# Allegro board KB_V15.brd
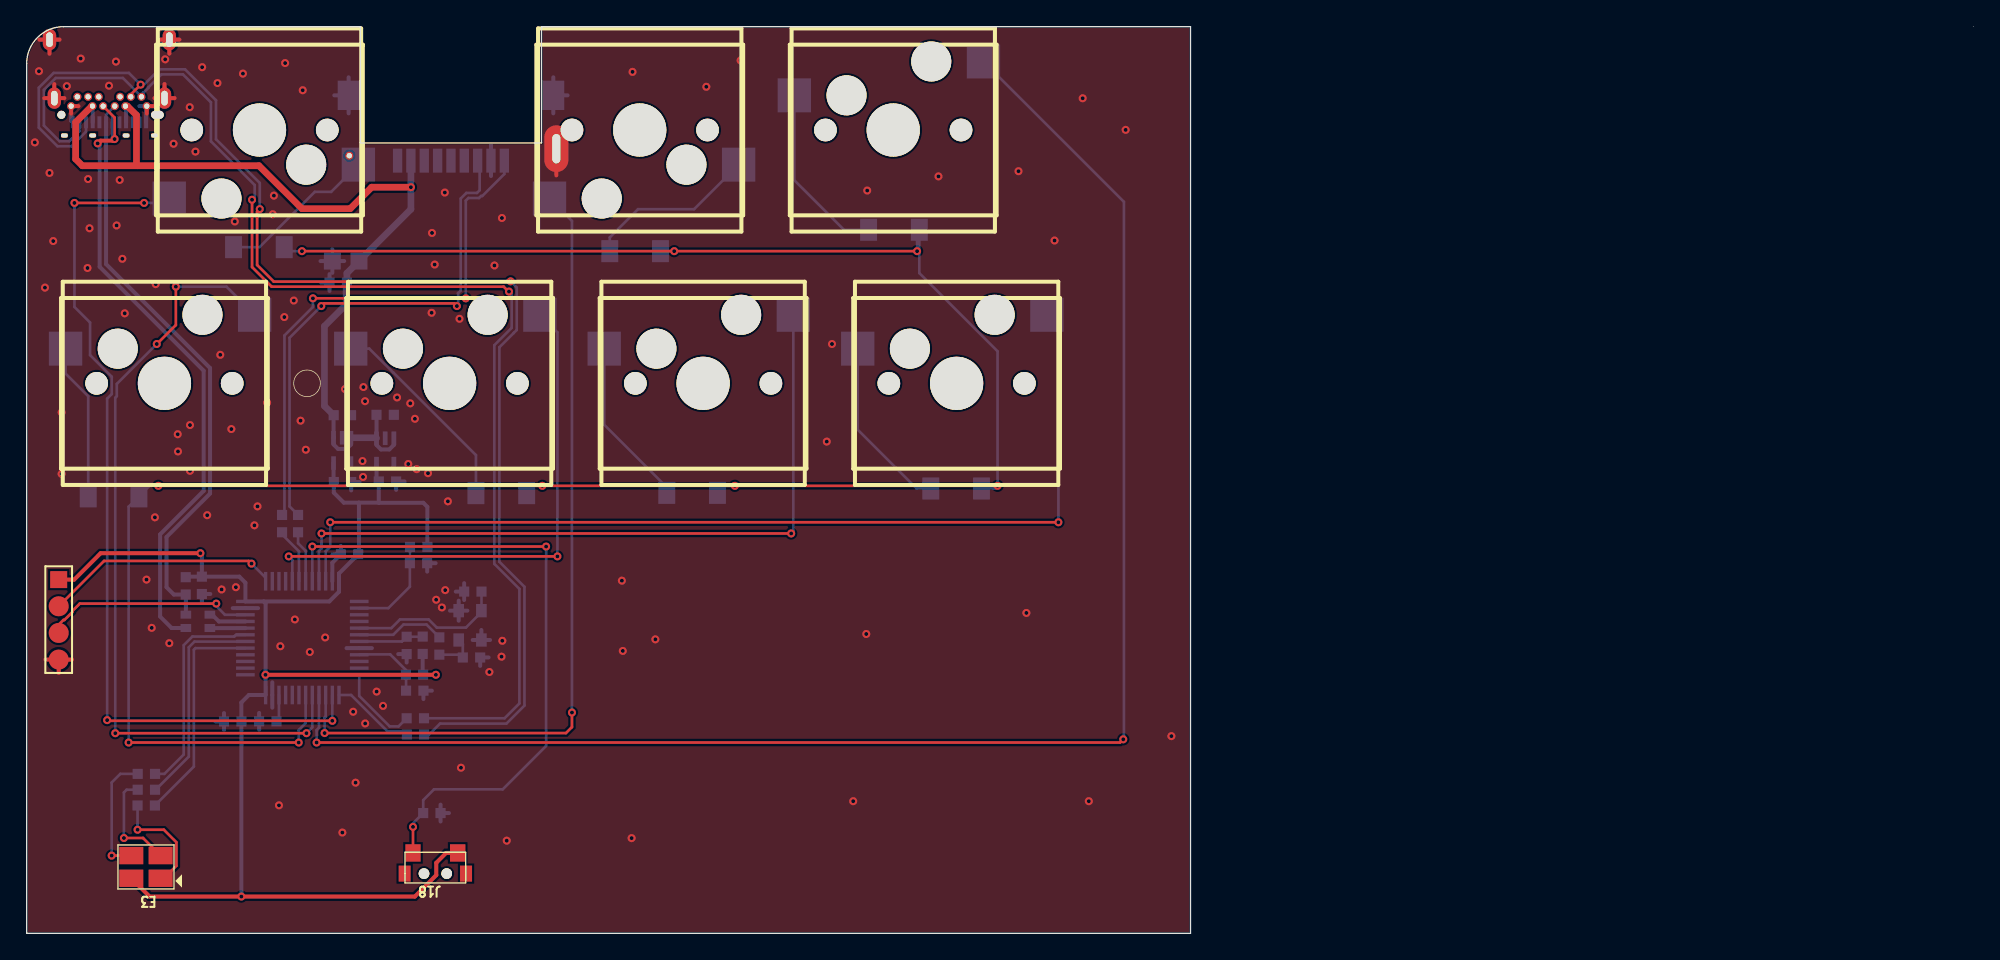
[diagram p0: board, top side]
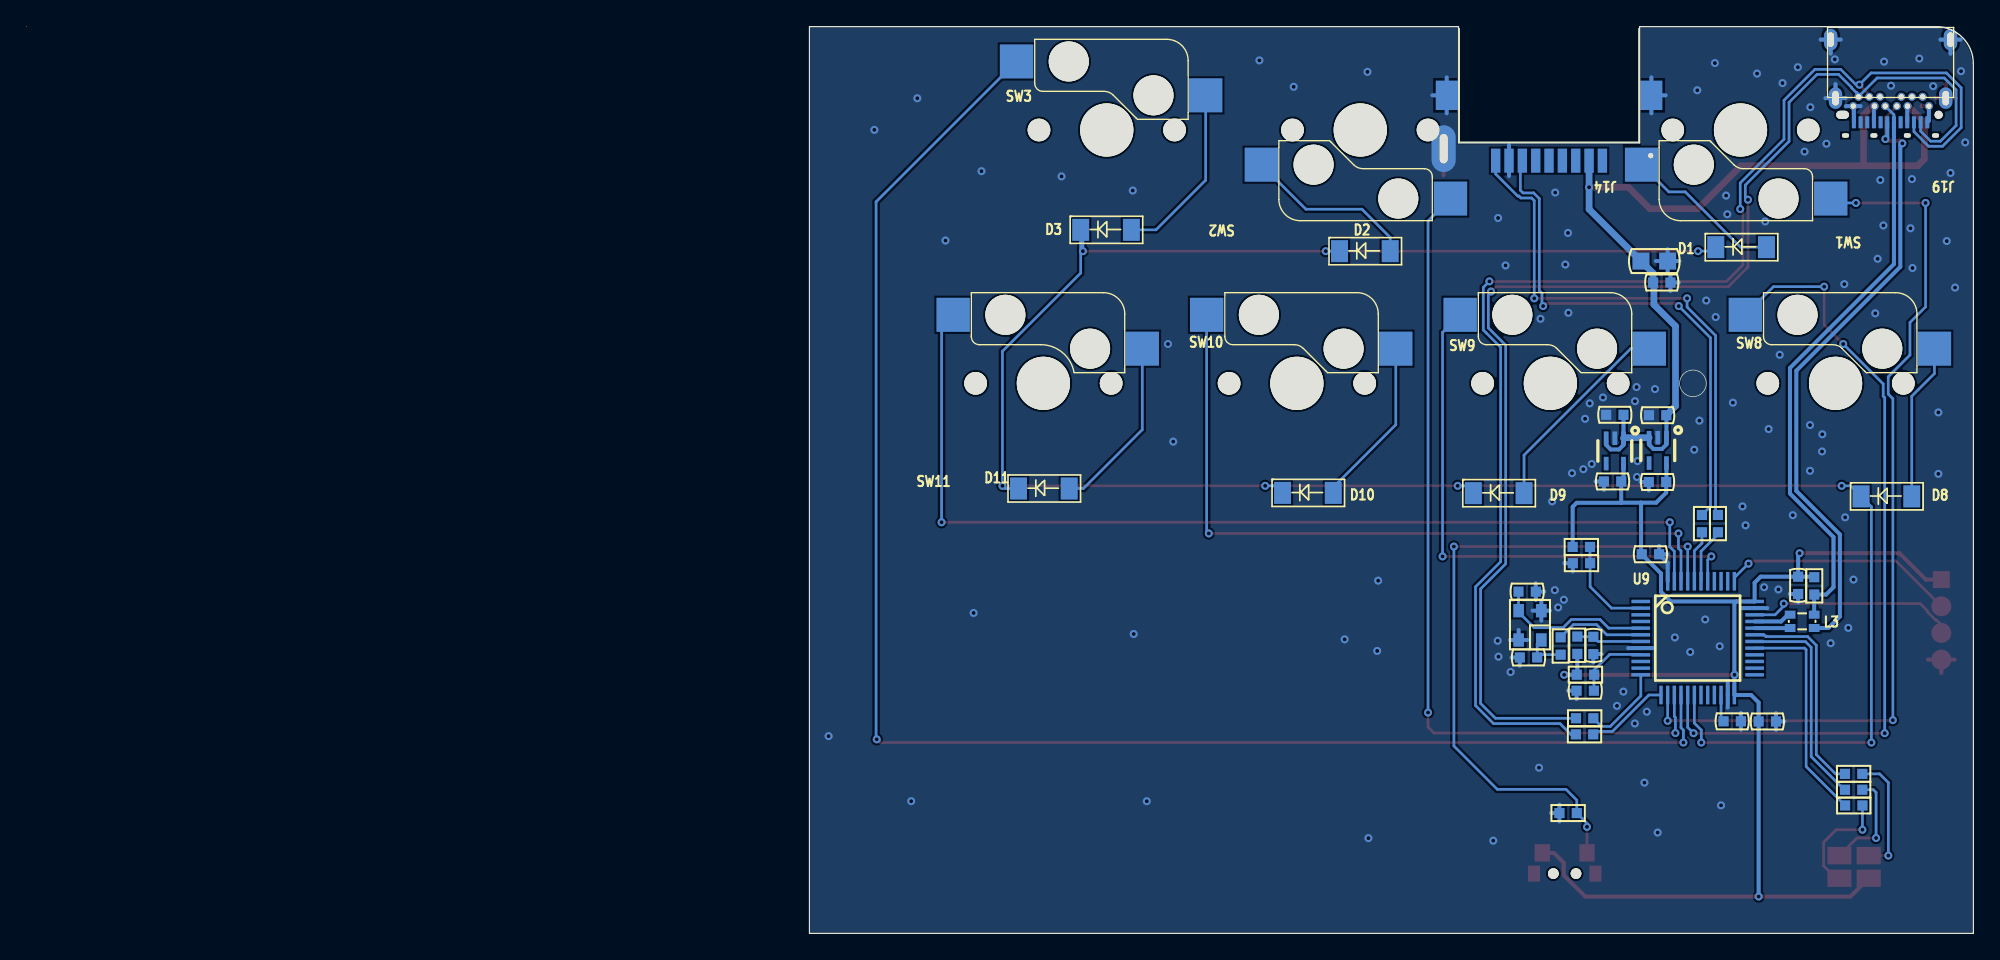
[diagram p1: board, bottom side, seen from below]

Outline 145.9 x 68 mm; copper layers: TOP, BOTTOM. Coordinates in mm from the lower left corner of the outline.
Outline path: circle c21.01,41.25 r1 ; 145.9,68 145.9,68 ; 0,65.23 arc(0.81,67.19) 2.77,68 25.01,68 25.01,59.28 38.59,59.28 38.59,68 87.23,68 87.23,0 0,0 0,65.23

## Design rules (mm)
nets with their own width: min track width 0.3; nets GND

## Placement (name value [footprint] x y rotation side)
C1  0.1uF/16V  [C0603]  28.48 22.24 270 bottom
C2  10uF/6.3V  [C0603]  16.09 15.89 180 bottom
C4  0.1uF/16V  [C0603]  13.13 26.75 270 bottom
C5  0.1uF/16V  [C0603]  24.85 28.43 180 bottom
C6  0.1uF/16V  [C0603]  28.44 18.2 0 bottom
C7  22pF/50V  [C0603]  32.79 25.63 0 bottom
C8  22pF/50V  [C0603]  33.99 20.69 180 bottom
C9  2.2uF/6.3V  [C0603]  18.72 15.9 180 bottom
C10  0.1uF/16V  [C0603]  24 48.81 180 bottom
C11  22uF/6.3V  [C0805]  24.91 50.42 180 bottom
C12  1uF/10V  [C0603]  23.01 38.86 0 bottom
C13  1uF/10V  [C0603]  23.02 33.85 0 bottom
C14  1uF/10V  [C0603]  26.22 38.89 0 bottom
C15  1uF/10V  [C0603]  26.39 33.89 0 bottom
D1  RB520S-30  [SOD123]  19.3 51.46 180 bottom
D2  RB520S-30  [SOD123]  47.5 51.16 180 bottom
D3  RB520S-30  [SOD123]  66.9 52.76 180 bottom
D8  RB520S-30  [SOD123]  8.41 32.77 180 bottom
D9  RB520S-30  [SOD123]  37.47 33.01 180 bottom
D10  RB520S-30  [SOD123]  51.77 33.03 180 bottom
D11  RB520S-30  [SOD123]  71.56 33.36 180 bottom
E3  RGB-LED  [LED_3528_2]  8.94 4.93 180 top
J2  ARM_PROG  [SIP_4P_50_DL_ARM]  2.4 26.53 270 top
J14  USB_A_TYPE  [USBATYPE]  31.8 67.85 0 bottom
J18  CON6  [KEYRESET]  30.63 4.48 180 top
J19  USBCTYPEDIP  [USBMINICTYPEDIP]  2.6 61.39 0 bottom
L1  300R/100MHz  [R0603]  29.72 19.4 180 bottom
L3  SDCW2012-2-900TF  [SDCW2012]  12.83 23.4 180 bottom
NOREF  -  []  87.23 0 90 top
NOREF#2  -  []  0 65.23 0 top
R2  10K/1%  [R0603]  29.68 20.96 90 bottom
R4  910R  [R0603]  30.93 20.9 90 bottom
R20  1K  [R0603]  8.31 9.59 0 bottom
R21  510R  [R0603]  8.32 10.77 0 bottom
R22  330R  [R0603]  8.32 11.96 0 bottom
R26  330R  [R0603]  31.02 9.02 180 bottom
R27  1.5K  [R0603]  11.92 25.41 90 bottom
R28  1K  [R0603]  30.02 27.76 180 bottom
R29  1K  [R0603]  28.73 28.98 0 bottom
R30  330R  [R0603]  19.14 31.38 270 bottom
R31  330R  [R0603]  20.34 31.38 270 bottom
R32  330R  [R0603]  29.78 16.13 180 bottom
R33  330R  [R0603]  29.79 14.92 180 bottom
SW1  2-WAY SWITCH  [KEY_SECOND]  17.45 60.25 0 bottom
SW2  2-WAY SWITCH  [KEY_SECOND]  45.95 60.25 0 bottom
SW3  2-WAY SWITCH  [KEY_SECOND]  64.95 60.25 180 bottom
SW8  2-WAY SWITCH  [KEY_SECOND]  10.33 41.25 180 bottom
SW9  2-WAY SWITCH  [KEY_SECOND]  31.7 41.25 180 bottom
SW10  2-WAY SWITCH  [KEY_SECOND]  50.7 41.25 180 bottom
SW11  2-WAY SWITCH  [KEY_SECOND3]  69.7 41.25 180 bottom
U3  SGM2019-3.3YC5G/TR  [SC70-5]  26.87 36.18 270 bottom
U4  SGM2019-3.3YC5G/TR  [SC70-5]  23.65 36.22 270 bottom
U9  STM32F103C6  [LQFP48_20_355]  20.66 22.14 180 bottom
Y1  12MHz/12pF/30ppm  [OSC3225]  33.23 23.1 0 bottom

## Library data of the parts
C1 C2 C4-C10 C12-C15 = CAP NP: User Part Number: *; Tolerance: *
C11 = CAP NP: Tolerance: *; User Part Number: *
D1-D3 D8-D11 = DIODE
E3 = LED_3528_RGB
J2 = CON4
J14 = CON13
J18 = CON6
J19 = CON34
L1 = BEAD: User Part Number: *; Tolerance: *
L3 = CHOKE CM14
R2 R4 R20-R22 R26-R33 = R: User Part Number: *; Tolerance: *
SW1-SW3 SW8-SW11 = SW KEY-SPST
U3 U4 = PAM3101DBA330
U9 = STM32F103C6
Y1 = CRYSTAL-3225: User Part Number: pn; Tolerance: RichardLC

## Footprints (pads in the part's own frame, mm; a bottom-side part is the same pattern mirrored in y, then rotated)
C0603
  rect 0.76x0.76 smd: 1(0,0) 2(1.3,0)
C0805
  rect 1.27x1.27 smd: 1(0,0) 2(2,0)
KEY_SECOND
  round 1.702 hole 1.702 unplated: (-5.08,0) (5.08,0)
  round 3 hole 3 unplated: (-2.85,5.14) (3.5,2.6)
  round 3.988 hole 3.988 unplated: (0,0)
  rect 2.5x2.55 smd: 1(-6.763,5.14) 2(7.412,2.6)
KEY_SECOND3
  round 1.702 hole 1.702 unplated: (-5.08,0) (5.08,0)
  round 3 hole 3 unplated: (-2.85,5.14) (3.5,2.6)
  round 3.988 hole 3.988 unplated: (0,0)
  rect 2.5x2.55 smd: 1(-6.763,5.14) 2(7.412,2.6)
KEYRESET
  round 0.8 hole 0.8 unplated: (-0.85,0) (0.85,0)
  rect 0.9x1.2 smd: 1(-2.3,0) 2(2.3,0)
  rect 1.15x1.3 smd: 3(-1.675,-1.55) 4(1.675,-1.55)
LED_3528_2
  rect 1.8x1.3 smd: 1(-1.1,0.8) 2(-1.1,-0.9) 3(1.1,-0.9) 4(1.1,0.8)
LQFP48_20_355
  rect 1.397x0.254 smd: 1(-4.266,2.75) 2(-4.266,2.25) 3(-4.266,1.75) 4(-4.266,1.25) 5(-4.266,0.75) 6(-4.266,0.25) 7(-4.266,-0.25) 8(-4.266,-0.75) 9(-4.266,-1.25) 10(-4.266,-1.75) 11(-4.266,-2.25) 12(-4.266,-2.75) 25(4.266,-2.75) 26(4.266,-2.25) 27(4.266,-1.75) 28(4.266,-1.25) 29(4.266,-0.75) 30(4.266,-0.25) 31(4.266,0.25) 32(4.266,0.75) 33(4.266,1.25) 34(4.266,1.75) 35(4.266,2.25) 36(4.266,2.75)
  rect 0.254x1.397 smd: 13(-2.75,-4.266) 14(-2.25,-4.266) 15(-1.75,-4.266) 16(-1.25,-4.266) 17(-0.75,-4.266) 18(-0.25,-4.266) 19(0.25,-4.266) 20(0.75,-4.266) 21(1.25,-4.266) 22(1.75,-4.266) 23(2.25,-4.266) 24(2.75,-4.266) 37(2.75,4.266) 38(2.25,4.266) 39(1.75,4.266) 40(1.25,4.266) 41(0.75,4.266) 42(0.25,4.266) 43(-0.25,4.266) 44(-0.75,4.266) 45(-1.25,4.266) 46(-1.75,4.266) 47(-2.25,4.266) 48(-2.75,4.266)
OSC3225
  rect 0.8x1 smd: 1(-0.85,1.1) 2(-0.85,-1.1) 3(0.85,-1.1) 4(0.85,1.1)
R0603
  rect 0.76x0.76 smd: 1(0,0) 2(1.3,0)
SC70-5
  rect 1.016x0.356 smd: 1(-0.95,0.65) 2(-0.95,0) 3(-0.95,-0.65) 4(0.95,-0.65) 5(0.95,0.65)
SDCW2012
  rect 0.8x0.6 smd: 1(-0.9,0.5) 2(0.9,0.5) 3(0.9,-0.5) 4(-0.9,-0.5)
SIP_4P_50_DL_ARM
  rect 1.27x1.27 smd: 1(0,0)
  round 1.5 smd: 2(2,0) 3(4,0) 4(6,0)
SOD123
  rect 1.27x1.651 smd: 1(3.8,0) 2(0,0)
USBATYPE
  rect 0.7x1.8 smd: 1(-3,9.9) 2(-1,9.9) 3(1,9.9) 4(3,9.9) 5(4,9.9) 6(2,9.9) 7(0,9.9) 8(-2,9.9) 9(-4,9.9)
  rect 1.64x2.2 smd: 10(-7.67,5) 11(7.67,5)
  round 0.6 hole 0.4: 12(-7.62,9.525)
  oval 1.8x3.5 hole 0.6x2.2: 13(7.9,9)
USBMINICTYPEDIP
  rect 0.5x0.3 hole 0.5x0.3 unplated: (0.23,1.55) (2.35,1.55) (4.85,1.55) (6.98,1.55)
  oval 0.95x0.6 hole 0.95x0.6 unplated: (7.2,0)
  rect 0.3x0.9 smd: 1(0.85,0.56) 2(1.35,0.56) 3(1.85,0.56) 4(2.35,0.56) 5(2.85,0.56) 6(3.35,0.56) 7(3.85,0.56) 8(4.35,0.56) 9(4.85,0.56) 10(5.35,0.56) 11(5.85,0.56) 12(6.35,0.56)
  round 0.6 hole 0.4: 13(6.4,-0.65) 14(6,-1.35) 15(5.2,-1.35) 16(4.8,-0.65) 17(4.4,-1.35) 18(4,-0.65) 19(3.13,-0.65) 20(2.8,-1.35) 21(2.33,-0.65) 22(2,-1.35) 23(1.2,-1.35) 24(0.73,-0.65)
  round 0.6 hole 0.65: 25(0,0)
  oval 1x1.6 hole 0.5x1.1: 27(-0.53,-1.25) 28(7.73,-1.25) 29(-0.89,-5.64) 30(8.09,-5.64)

## Nets
GND: C1.2 C2.2 C4.2 C5.2 C6.2 C7.1 C8.1 C9.2 C10.2 C11.2 C12.2 C13.2 C14.2 C15.2 J2.4 J14.4 J14.10 J14.11 J14.13 J19.1 J19.12 J19.13 J19.24 J19.27 J19.28 J19.29 J19.30 R26.1 R28.1 U3.2(GND) U4.2(GND) U9.8(VSSA/VREF-) U9.23(VSS1) U9.35(VSS2) U9.47(VSS3) Y1.2(GND#2) Y1.4(GND#4)
VBUS_R: C10.1 C11.1 C12.1 C14.1 J14.1 J19.4 J19.9 J19.16 J19.21 U3.1(VIN) U3.3(EN) U4.1(VIN) U4.3(EN)
VCC_3V3_R: C2.1 C4.1 C5.1 C13.1 C15.1 E3.4(COM) J2.1 J18.3 L1.1 R2.1 R27.2 R29.2 U3.5(VOUT) U4.5(VOUT) U9.24(VDD1) U9.36(VDD2) U9.48(VDD3)
ARM_SWCLK_R: J2.2 U9.37(PA14/JTCK_SWCK)
ARM_SWDIO_R: J2.3 U9.34(PA13/JTMS_SWDIO)
CA1: U9.3(PC14/OSC32_IN)
CA2: U9.4(PC15/OSC32_OUT)
CA3: U9.38(PA15/JTDI/SPI1_NSS/SPI3_NSS/I2S)
CA4: U9.21(PB10/SPI2_SCK/I2S2_CK/I2C2_SCL/)
CA5: U9.25(PB12/SPI2_NSS/I2S2_WS/I2C2_SMBA)
CA6: U9.26(PB13/SPI2_SCK/I2S2_CK/TIM1_CH1N)
CA7: U9.27(PB14/SPI2_MISO/I2S2EXT_SD/TIM1_)
CA8: U9.28(PB15/SPI2_MOSI/I2S2_SD/TIM1_CH3)
COL1: U9.10(PA0/USART2_CTS/TIM2_CH1/TIM2_ET)
COL2: U9.11(PA1/USART2_RTS/TIM2_CH2/TIM5_CH)
COL3: SW1.1 U9.14(PA4/SPI1_NSS/SPI3_NSS/I2S3_WS/U)
COL4: SW2.1 U9.15(PA5/SPI1_SCK/TIM2_CH1/TIM2_ETR/)
COL5: SW3.1 U9.16(PA6/SPI1_MISO/TIM1_BKIN/TIM3_CH)
COL6: SW8.1 U9.17(PA7/SPI1_MOSI/TIM1_CH1N,TIM3_CH)
COL7: SW9.1 U9.41(PB5/SPI1_MOSI/SPI3_MOSI/I2S3_SD)
COL8: SW10.1 U9.45(PB8/I2C1_SCL/TIM4J_CH3/TIM10_CH)
COL9: SW11.1 U9.46(PB9/SPI2_NSS/I2S2_WS/I2C1_SDA/T)
PA15_R_B: R22.2 U9.31(PA10/USART1_RX/TIM1_CH3/OTG_FS_)
PC14_R_R: R20.2 U9.29(PA8/I2C3_SCL/USART1_CK/TIM1_CH1)
PC15_R_G: R21.2 U9.30(PA9/I2C3_SMBA/USART1_TX/TIM1_CH)
PCBVER: R28.2 R29.1 U9.2(PC13/RTC_TAMP1/RTC_OUT/RTC_TS)
ROW1: D1.2(K) D2.2(K) D3.2(K) D8.2(K) D9.2(K) D10.2(K) D11.2(K) U9.18(PB0/TIM1_CH2N/TIM3_CH3/ADC1_IN8)
ROW2: U9.19(PB1/TIM1_CH3N/TIM3_CH4/ADC1_IN9)
ROW3: U9.20(PB2/BOOT1)
ROW4: U9.39(PB3/JTDO_SWO/SPI1_SCK/SPI3_SCK/)
ROW5: U9.40(PB4/NJTRST/SPI1_MISO/SPI3_MISO_)
UART1_RX: J14.6 R31.1
UART1_RX_R: R31.2 U9.43(PB7/I2C1_SDA/USART1_RX/TIM4_CH2)
UART1_TX: J14.5 R30.1
UART1_TX_R: R30.2 U9.42(PB6/I2C1_SCL/USART1_TX/TIM4_CH1)
UART2_RX: J19.3 J19.15 R33.1
UART2_RX_R: R33.2 U9.13(PA3/USART2_RX/TIM2_CH4/TIM5_CH4)
UART2_TX: J19.2 J19.14 R32.1
UART2_TX_R: R32.2 U9.12(PA2/USART2_TX/TIM2_CH3/TIM5_CH3)
USB_DM_R: J19.7 J19.19 L3.3
USB_DP_R: J19.6 J19.18 L3.2 R27.1
N16733493: D1.1(A) SW1.2
N16734057: D2.1(A) SW2.2
N16734061: D3.1(A) SW3.2
N16734065: D8.1(A) SW8.2
N16734085: D9.1(A) SW9.2
N16734089: D10.1(A) SW10.2
N16734093: D11.1(A) SW11.2
N16743024: J18.4 R26.2 U9.44(BOOT0)
N16743076: C6.1 L1.2 U9.9(VDDA/VREF+)
N16743758: C1.1 R2.2 U9.7(NRST)
N16743834: C8.2 R4.1 Y1.1(XIN)
N16743838: C7.2 U9.5(PH0/OSC_IN) Y1.3(XOUT)
N16743898: R4.2 U9.6(PH1/OSC_OUT)
N16744056: C9.1 U9.22(VCAP1)
N16744084: L3.1 U9.33(PA12/USART1_RTS/USART6_RX/TIM1_)
N16744088: L3.4 U9.32(PA11/USART1_CTS/USART6_TX/TIM1_)
N16823930: E3.1(R) R20.1
N16823933: E3.2(G) R21.1
N16823936: E3.3(B) R22.1

Pads without a net: J14 2 3 7 8 9 12; J18 1 2; J19 5 8 10 11 17 20 22 23 25; U3 4; U4 4; U9 1

## Via types
v1: diameter 0.6, hole 0.3, TOP to BOTTOM, 160 vias

## Routing (per net, layer and track width the routed paths; a pad name or vN(x,y) marks a point on that pad's centre or on a via; arc(x,y) is an arc through that point)
GND: length 73.8
  TOP w0.3: 10.69,65.98 J19.30 ; J19.30 11.44,67.03 ; J19.30 9.94,67.03 ; 3.88,62.04 J19.24 3.33,61.49 ; 9.55,62.04 J19.13 9,61.49 ; 1.32,62.64 J19.27 ; J19.27 2.07,63.69 ; J19.27 2.82,62.64 ; 39.7,56.85 39.7,57.73 ; J19.28 11.08,62.64 ; J19.28 10.33,63.69 ; J19.28 9.58,62.64 ; 1.71,65.98 J19.29 ; J19.29 2.46,67.03 ; J19.29 0.96,67.03 ; J2.4 3.4,20.53 ; J2.4 1.4,20.53 ; J2.4 2.4,19.53
  TOP w0.5: 39.7,57.73 J14.13
  BOTTOM w0.3: 33.43,22 Y1.4 ; Y1.4 34.08,22.75 ; Y1.4 34.73,22 ; 18.41,16.93 U9.23 18.41,18.82 ; J19.28 11.08,62.64 ; J19.28 9.58,62.64 ; J19.28 10.33,63.69 ; 10.69,65.98 J19.30 ; J19.30 11.44,67.03 ; J19.30 9.94,67.03 ; 23.06,62.85 J14.10 ; J14.10 24.13,64.2 ; J14.10 24.13,61.5 ; 27.85,20.94 C1.2 28.48,20.31 ; 22.07,48.81 C10.2 ; C10.2 22.7,49.44 ; C10.2 22.7,48.18 ; 23.98,21.39 U9.8 25.87,21.39 ; 14.79,15.26 C2.2 ; C2.2 14.79,16.52 ; C2.2 14.16,15.89 ; C11.2 22.91,51.31 ; C11.2 22.02,50.42 ; C11.2 22.91,49.53 ; C11.2 23.8,50.42 ; 30.02,27.13 R28.1 30.65,27.76 ; J19.13 9.55,62.04 ; J19.13 8.45,62.04 ; J19.13 8.95,61.99 J19.12 ; 32.79,25 C7.1 ; C7.1 32.79,26.26 ; C7.1 32.16,25.63 ; 28.32,33.89 C15.2 27.69,33.26 ; 15.44,24.39 U9.35 17.34,24.39 ; 1.71,65.98 J19.29 ; J19.29 2.46,67.03 ; J19.29 0.96,67.03 ; 24.95,33.85 C13.2 24.32,33.22 ; 17.42,16.53 C9.2 17.42,15.27 ; Y1.2 32.38,24.95 ; Y1.2 31.73,24.2 ; Y1.2 33.03,24.2 ; Y1.2 32.38,23.45 ; U9.47 22.91,27.79 C5.2 ; C5.2 23.55,29.06 ; C5.2 22.92,28.43 ; J14.11 40.54,62.85 ; J14.11 39.47,61.5 ; J14.11 39.47,64.2 ; 34.62,20.69 C8.1 33.99,20.06 ; 30.37,18.2 C6.2 29.74,17.57 ; 34.8,59.1 J14.4 34.8,56.8 ; J19.1 3.33,60.95 J19.24 ; R26.1 31.02,9.65 ; R26.1 31.65,9.02 ; R26.1 31.02,8.39 ; 13.13,24.82 C4.2 13.76,25.45
  vias: v1(0.61,59.32) v1(0.92,64.66) v1(1.37,48.43) v1(1.71,57.03) v1(1.99,51.92) v1(2.62,39.07) v1(2.62,34.46) v1(3.01,63.54) v1(4.05,65.61) v1(4.56,49.9) v1(4.6,56.57) v1(4.71,52.88) v1(6.17,63.57) v1(6.69,65.38) v1(6.74,53.09) v1(6.97,56.5) v1(7.17,50.59) v1(7.35,46.5) v1(8.98,26.53) v1(9.37,22.91) v1(9.67,48.69) v1(9.61,31.2) v1(10.38,65.55) v1(10.69,21.76) v1(11.01,59.22) v1(11.32,37.43) v1(11.34,36.14) v1(12.22,61.96) v1(12.24,38.12) v1(12.24,34.69) v1(12.65,58.63) v1(13.15,64.96) v1(13.53,31.36) v1(14.3,63.77) v1(14.51,43.39) v1(14.61,25.79) v1(15.34,37.82) v1(15.6,53.39) v1(15.68,25.96) v1(16.21,64.48) v1(17.07,30.6) v1(17.3,32.02) v1(18.02,39.8) v1(18.44,53.93) v1(18.53,55.33) v1(18.91,9.6) v1(19.01,21.53) v1(19.37,65.27) v1(19.31,46.22) v1(20.02,47.46) v1(20.1,23.54) v1(20.53,38.45) v1(20.69,63.23) v1(20.92,36.27) v1(21.22,21.1) v1(22.37,22.19) v1(23.66,7.56) v1(23.86,40.82) v1(24.47,16.62) v1(24.65,11.3) v1(25.17,35.42) v1(25.24,40.97) v1(25.21,34.23) v1(25.36,39.91) v1(25.37,15.74) v1(26.23,18.13) v1(26.71,17.06) v1(27.76,40.19) v1(28.6,35.2) v1(28.75,39.75) v1(29.1,38.59) v1(29.23,34.81) v1(30.08,34.51) v1(30.38,52.53) v1(30.35,46.54) v1(30.58,50.16) v1(30.69,25.02) v1(31.12,24.44) v1(31.34,55.56) v1(31.37,25.74) v1(31.57,32.4) v1(32.44,46.09) v1(32.55,12.42) v1(34.68,19.6) v1(35.06,50.09) v1(35.59,20.75) v1(35.62,53.65) v1(35.65,21.94) v1(35.98,6.95) v1(44.61,26.45) v1(44.68,21.18) v1(45.34,7.14) v1(45.41,64.61) v1(47.12,22.05) v1(50.94,63.49) v1(53.51,65.47) v1(59.97,36.88) v1(60.36,44.2) v1(61.95,9.91) v1(63,55.71) v1(62.93,22.45) v1(68.34,56.77) v1(74.34,57.16) v1(74.93,24.03) v1(77.04,51.96) v1(79.15,62.63) v1(79.61,9.91) v1(82.37,60.26) v1(85.8,14.79)
VBUS_R: length 71.8
  TOP w0.5: 8.24,57.62 8.19,57.57 4.17,57.57 3.67,58.07 3.67,60.83 4.88,62.04 J19.21 ; 8.24,57.62 8.23,57.63 8.23,61.36 7.55,62.04 J19.16 ; 8.24,57.62 8.29,57.57 17.41,57.57 20.63,54.35 24.25,54.35 25.86,55.96 v1(28.8,55.96)
  BOTTOM w0.3: J19.9 7.45,61.99 J19.16 ; U4.3 24.3,36.65 23.98,36.33 23.34,36.33 23,36.67 U4.1 23,38.85 C12.1 ; J19.4 4.95,62.02 J19.21 ; U3.3 27.52,36.63 27.18,36.29 26.56,36.29 26.22,36.63 U3.1 C14.1
  BOTTOM w0.5: C12.1 22.32,39.55 22.32,45.54 23.94,47.16 23.94,48.75 C10.1 24,49.51 C11.1 28.8,54.31 v1(28.8,55.96) J14.1 ; U3.1 26.18,37.17 U4.3
VCC_3V3_R: length 115.6
  TOP w0.3: J2.1 3.56,26.53 5.54,28.51 v1(13.02,28.51) ; E3.4 9.21,2.76 v1(16.09,2.76) 29.09,2.76 30.7,4.37 30.7,5.29 31.44,6.03 J18.3 ; 17.91,19.4 v1(17.9,19.39) v1(30.67,19.39)
  BOTTOM w0.3: 24.9,32.3 26.39,32.3 ; 24.9,32.3 23.77,32.3 23.02,33.05 C13.1 23,33.87 U4.5 ; 24.9,32.3 24.9,28.48 C5.1 23.41,26.99 U9.48 23.41,25.61 22.69,24.89 17.77,24.89 ; 26.39,32.3 C15.1 26.22,34.06 U3.5 ; 26.39,32.3 26.4,32.29 29.73,32.29 30.03,31.99 R29.2 ; v1(16.09,2.76) C2.1 16.09,17.31 16.65,17.87 U9.24 17.91,19.4 ; 17.77,24.89 17.91,24.75 17.91,19.4 ; 17.77,24.89 U9.36 16.39,26.3 15.94,26.75 C4.1 ; v1(13.02,28.51) 13.13,28.4 C4.1 ; v1(30.67,19.39) 29.73,19.39 L1.1 29.68,19.44 R2.1 ; C4.1 11.96,26.75 R27.2 ; 17.91,19.4 v1(17.9,19.39)
ARM_SWCLK_R: length 17.7
  TOP w0.2: J2.2 5.8,27.93 16.65,27.93 v1(16.85,27.73)
  BOTTOM w0.2: v1(16.85,27.73) 17.91,26.67 U9.37
ARM_SWDIO_R: length 15.8
  TOP w0.2: v1(14.21,24.73) 3.98,24.73 3.43,24.18 3.43,24.1 2.83,23.5 2.75,23.5 2.4,23.15 J2.3
  BOTTOM w0.2: v1(14.21,24.73) 14.21,24.54 14.86,23.89 U9.34
COL3: length 66.3
  TOP w0.2: v1(22.91,15.94) 6.08,15.94 v1(6.03,15.99) ; v1(3.58,54.78) v1(8.8,54.78)
  BOTTOM w0.2: 10.79,55.01 SW1.1 10.36,54.78 v1(8.8,54.78) ; v1(6.03,15.99) 6.03,40.1 6.38,40.45 6.38,41.74 4.75,43.37 4.75,45.81 3.58,46.98 v1(3.58,54.78) ; U9.14 v1(22.91,15.94)
COL4: length 62
  TOP w0.2: v1(22.33,15.02) 40.42,15.02 40.87,15.47 v1(40.87,16.56)
  BOTTOM w0.2: SW2.1 40.87,53.43 v1(40.87,16.56) ; U9.15 22.41,16.26 22.33,16.18 v1(22.33,15.02)
COL5: length 119.4
  TOP w0.2: v1(21.73,14.31) 81.95,14.31 v1(82.19,14.55)
  BOTTOM w0.2: U9.16 21.91,15.42 21.73,15.24 v1(21.73,14.31) ; SW3.1 82.24,54.86 82.24,14.6 v1(82.19,14.55)
COL6: length 59.5
  TOP w0.2: v1(11.18,48.5) 11.18,45.62 9.76,44.2 v1(9.75,44.2) ; v1(20.97,15.01) v1(6.64,15.01)
  BOTTOM w0.2: v1(11.18,48.5) 14.98,48.5 SW8.1 ; v1(6.64,15.01) 6.64,40.17 6.76,40.29 6.76,41.21 v1(9.75,44.2) ; v1(20.97,15.01) 21.41,15.45 U9.17
COL7: length 40.8
  TOP w0.2: v1(19.64,28.27) v1(39.78,28.27)
  BOTTOM w0.2: v1(19.64,28.27) 19.91,28 U9.41 ; v1(39.78,28.27) 39.78,45.07 SW9.1
COL8: length 55.3
  TOP w0.2: v1(22.1,29.99) v1(57.3,29.99)
  BOTTOM w0.2: U9.45 21.91,28.69 22.1,28.88 v1(22.1,29.99) ; v1(57.3,29.99) 57.46,30.15 SW10.1
COL9: length 75.1
  TOP w0.2: v1(22.75,30.83) v1(77.33,30.83)
  BOTTOM w0.2: U9.46 22.41,28.65 22.75,28.99 v1(22.75,30.83) ; v1(77.33,30.83) 77.33,45.52 SW11.1
Net_2: length 0.1
  BOTTOM w0.2: 24.88,57.51 24.88,57.65
PA15_R_B: length 15.9
  BOTTOM w0.2: U9.31 15.69,22.39 15.6,22.3 15.58,22.3 15.54,22.26 12.42,22.26 11.77,21.61 11.77,13.41 10.32,11.96 R22.2
PC14_R_R: length 16.8
  BOTTOM w0.2: U9.29 12.65,21.39 12.53,21.27 12.53,12.51 R20.2
PC15_R_G: length 16.2
  BOTTOM w0.2: U9.30 16.38,21.88 12.58,21.88 12.15,21.45 12.15,13.25 9.67,10.77 R21.2
PCBVER: length 7.4
  BOTTOM w0.2: R29.1 28.73,27.77 R28.2 28.72,26 27.11,24.39 U9.2
ROW1: length 176.1
  TOP w0.2: v1(20.39,14.31) v1(7.64,14.31) ; v1(20.63,51.16) v1(48.53,51.16) v1(66.74,51.16) ; v1(9.87,33.56) v1(38.65,33.56) v1(53.08,33.56) v1(72.77,33.56)
  BOTTOM w0.2: D11.2 72.57,33.36 v1(72.77,33.56) 72.77,43.65 66.9,49.52 D3.2 66.74,52.6 v1(66.74,51.16) ; v1(20.39,14.31) 20.39,15.25 20.91,15.77 U9.18 ; v1(38.65,33.56) 38.02,33.56 D9.2 ; D2.2 v1(48.53,51.16) ; v1(20.63,51.16) 19.6,51.16 D1.2 ; D10.2 52.3,33.56 v1(53.08,33.56) ; v1(9.87,33.56) 9.2,33.56 D8.2 7.64,32 v1(7.64,14.31)
UART1_RX: length 39.4
  TOP w0.2: v1(22.08,47.04) 22.28,47.24 32.05,47.24 v1(32.25,47.04)
  BOTTOM w0.2: J14.6 33.95,57.8 33.95,55.73 33.75,55.53 32.95,55.53 32.53,55.11 32.53,48.21 32.33,48.01 32.33,47.13 v1(32.25,47.04) ; R31.1 19.7,32.02 19.7,44.66 v1(22.08,47.04)
UART1_RX_R: length 3.9
  BOTTOM w0.2: R31.2 20.34,29.26 20.91,28.69 U9.43
UART1_TX: length 40.7
  TOP w0.2: v1(21.46,47.62) v1(32.91,47.62)
  BOTTOM w0.2: R30.1 19.32,31.56 19.32,44.84 21.46,46.97 v1(21.46,47.62) ; J14.5 35.8,56.95 34.15,55.3 34.06,55.3 33.91,55.15 33.11,55.15 32.91,54.95 v1(32.91,47.62)
UART1_TX_R: length 4.2
  BOTTOM w0.2: R30.2 19.14,29.92 20.41,28.65 U9.42
UART2_RX: length 100.1
  TOP w0.2: v1(17.47,54.32) 17.27,54.12 17.27,50.13 18.52,48.88 36.25,48.88 v1(36.27,48.9) ; v1(8.54,63.65) 7.8,62.91 J19.15
  BOTTOM w0.2: v1(36.27,48.9) 36.73,48.44 36.73,45.25 36.51,45.03 35.43,43.95 35.43,27.87 37.31,25.99 37.31,17.08 35.96,15.73 30.98,15.73 30.17,14.92 R33.1 ; v1(17.47,54.32) 17.47,56.28 14.19,59.56 14.19,62.48 11.87,64.8 9.94,64.8 8.79,63.65 v1(8.54,63.65) 7.66,64.53 2.02,64.53 0.91,63.42 0.91,60.43 2.31,59.03 3.35,59.03 4.45,60.13 J19.3
UART2_RX_R: length 6.3
  BOTTOM w0.2: U9.13 24.32,17.87 27.05,15.14 28.27,15.14 R33.2
UART2_TX: length 95.7
  TOP w0.2: v1(36.15,48.13) 36.02,48.26 35.99,48.26 35.75,48.5 18.36,48.5 16.89,49.97 v1(16.89,55.02)
  BOTTOM w0.2: v1(36.15,48.13) 36.22,48.06 36.22,48.05 36.35,47.92 36.35,45.41 35.05,44.11 35.05,27.71 36.93,25.83 36.93,17.24 35.82,16.13 R32.1 ; J19.2 3.95,60.16 3.2,59.41 2.46,59.41 1.29,60.58 1.29,63.26 2.18,64.15 7.21,64.15 8.6,62.76 ; 8.6,62.76 J19.14 ; 8.6,62.76 8.6,62.92 8.75,63.07 8.78,63.07 9.12,63.41 9.12,63.44 10.1,64.42 11.71,64.42 13.81,62.32 13.81,59.4 17.09,56.12 17.09,55.22 v1(16.89,55.02)
UART2_TX_R: length 6.3
  BOTTOM w0.2: U9.12 24.92,17.8 27.21,15.52 27.87,15.52 R32.2
USB_DM_R: length 48
  TOP w0.2: J19.19 6.59,61.18 v1(6.59,59.57)
  TOP w0.3: v1(5.32,59.25) 5.52,59.45 6.47,59.45 v1(6.59,59.57)
  BOTTOM w0.3: v1(6.59,59.57) 6.45,59.71 J19.7 ; L3.3 10.86,22.9 10,23.76 10,29.92 13.26,33.19 13.26,42.2 5.47,49.99 5.47,59.1 v1(5.32,59.25)
USB_DP_R: length 44.1
  BOTTOM w0.2: J19.6 5.95,61.39 J19.18
  BOTTOM w0.3: L3.2 11.93,25.4 R27.1 11.03,25.41 10.48,25.96 10.48,29.72 13.74,32.98 13.74,42.39 5.95,50.19 J19.6
N16733493: length 11.9
  BOTTOM w0.2: SW1.2 22.82,55.61 21.59,55.61 17.45,51.46 D1.1
N16734057: length 12.9
  BOTTOM w0.2: D2.1 43.7,52.19 45.82,54.31 50.02,54.31 SW2.2
N16734061: length 13.5
  BOTTOM w0.2: D3.1 61.26,52.76 57.54,56.48 SW3.2
N16734065: length 11.8
  BOTTOM w0.2: D8.1 4.61,40.28 2.91,41.98 SW8.2
N16734085: length 15.5
  BOTTOM w0.2: SW9.2 25.68,43.85 27.46,42.07 27.47,42.07 33.67,35.87 D9.1
N16734089: length 12.8
  BOTTOM w0.2: SW10.2 43.29,38.14 47.97,33.46 D10.1
N16734093: length 13.4
  BOTTOM w0.2: SW11.2 62.29,37.77 66.7,33.36 D11.1
N16743024: length 50.3
  TOP w0.2: v1(21.41,29.01) v1(38.93,29.01) ; J18.4 v1(28.96,7.98)
  BOTTOM w0.2: v1(28.96,7.98) 28.96,8.25 R26.2 29.72,9.99 30.53,10.8 35.68,10.8 38.93,14.05 v1(38.93,29.01) ; U9.44 v1(21.41,29.01)
N16743076: length 5.5
  BOTTOM w0.2: U9.9 24.95,20.92 27.25,20.92 28.42,19.75 L1.2 28.44,19.39 C6.1
N16743758: length 4.9
  BOTTOM w0.2: U9.7 28.13,21.89 C1.1 29.67,22.24 R2.2
N16743834: length 3.3
  BOTTOM w0.2: R4.1 32.48,20.9 C8.2 32.69,21.69 Y1.1
N16743838: length 11.7
  BOTTOM w0.2: C7.2 34.09,24.21 Y1.3 34.08,24.09 32.92,22.93 30.74,22.93 30.13,23.54 27.98,23.54 27.33,22.89 U9.5
N16743898: length 6.7
  BOTTOM w0.2: R4.2 29.97,23.16 28.24,23.16 27.47,22.39 U9.6
N16744056: length 2.1
  BOTTOM w0.2: C9.1 18.91,16.09 U9.22
N16744084: length 2.9
  BOTTOM w0.3: U9.33 14.41,23.39 13.9,23.9 L3.1
N16744088: length 2.7
  BOTTOM w0.3: U9.32 13.74,22.89 L3.4
N16823930: length 8.5
  TOP w0.2: v1(8.31,7.77) 10.28,7.77 11.22,6.83 11.22,5.06 10.29,4.13 E3.1
  BOTTOM w0.2: R20.1 v1(8.31,7.77)
N16823933: length 7.8
  TOP w0.2: E3.2 8.72,7.15 v1(7.29,7.15)
  BOTTOM w0.2: R21.1 7.49,10.77 7.29,10.57 v1(7.29,7.15)
N16823936: length 9.2
  TOP w0.2: v1(6.37,5.83) E3.3
  BOTTOM w0.2: R22.1 7.02,11.96 6.37,11.31 v1(6.37,5.83)

## Copper pours and planes (outline as drawn; the poured copper is in the pictures)
GND on TOP, BOTTOM: 24.91,59.18 38.69,59.18 38.69,67.9 87.13,67.9 87.13,0.1 0.1,0.1 0.1,65.23 0.88,67.12 2.77,67.9 24.91,67.9

## Text on the board
DIMENSION: unit:mm
COMPVAL_TYPE_BOTTOM: FIGURE | SIZE | 0.3 | 0.9 | 0.8 | 1.7018 | 3.0 | 3.9878 | 1.3x0.7 | 1.35x0.7 | 1.5x0.7 | 2.2x0.6 | DRILL CHART: TOP to BOTTOM | ALL UNITS ARE IN MILLIMETERS | TOLERANCE | +0.05/-0.05 | +0.0001/-0.0001 | +0.1/-0.1 | PLATED | NON-PLATED | QTY | 403 | 36 | 2 | 70 | 72
